# EAGLE board buck_connector-4new (EAGLE 9.2.1)
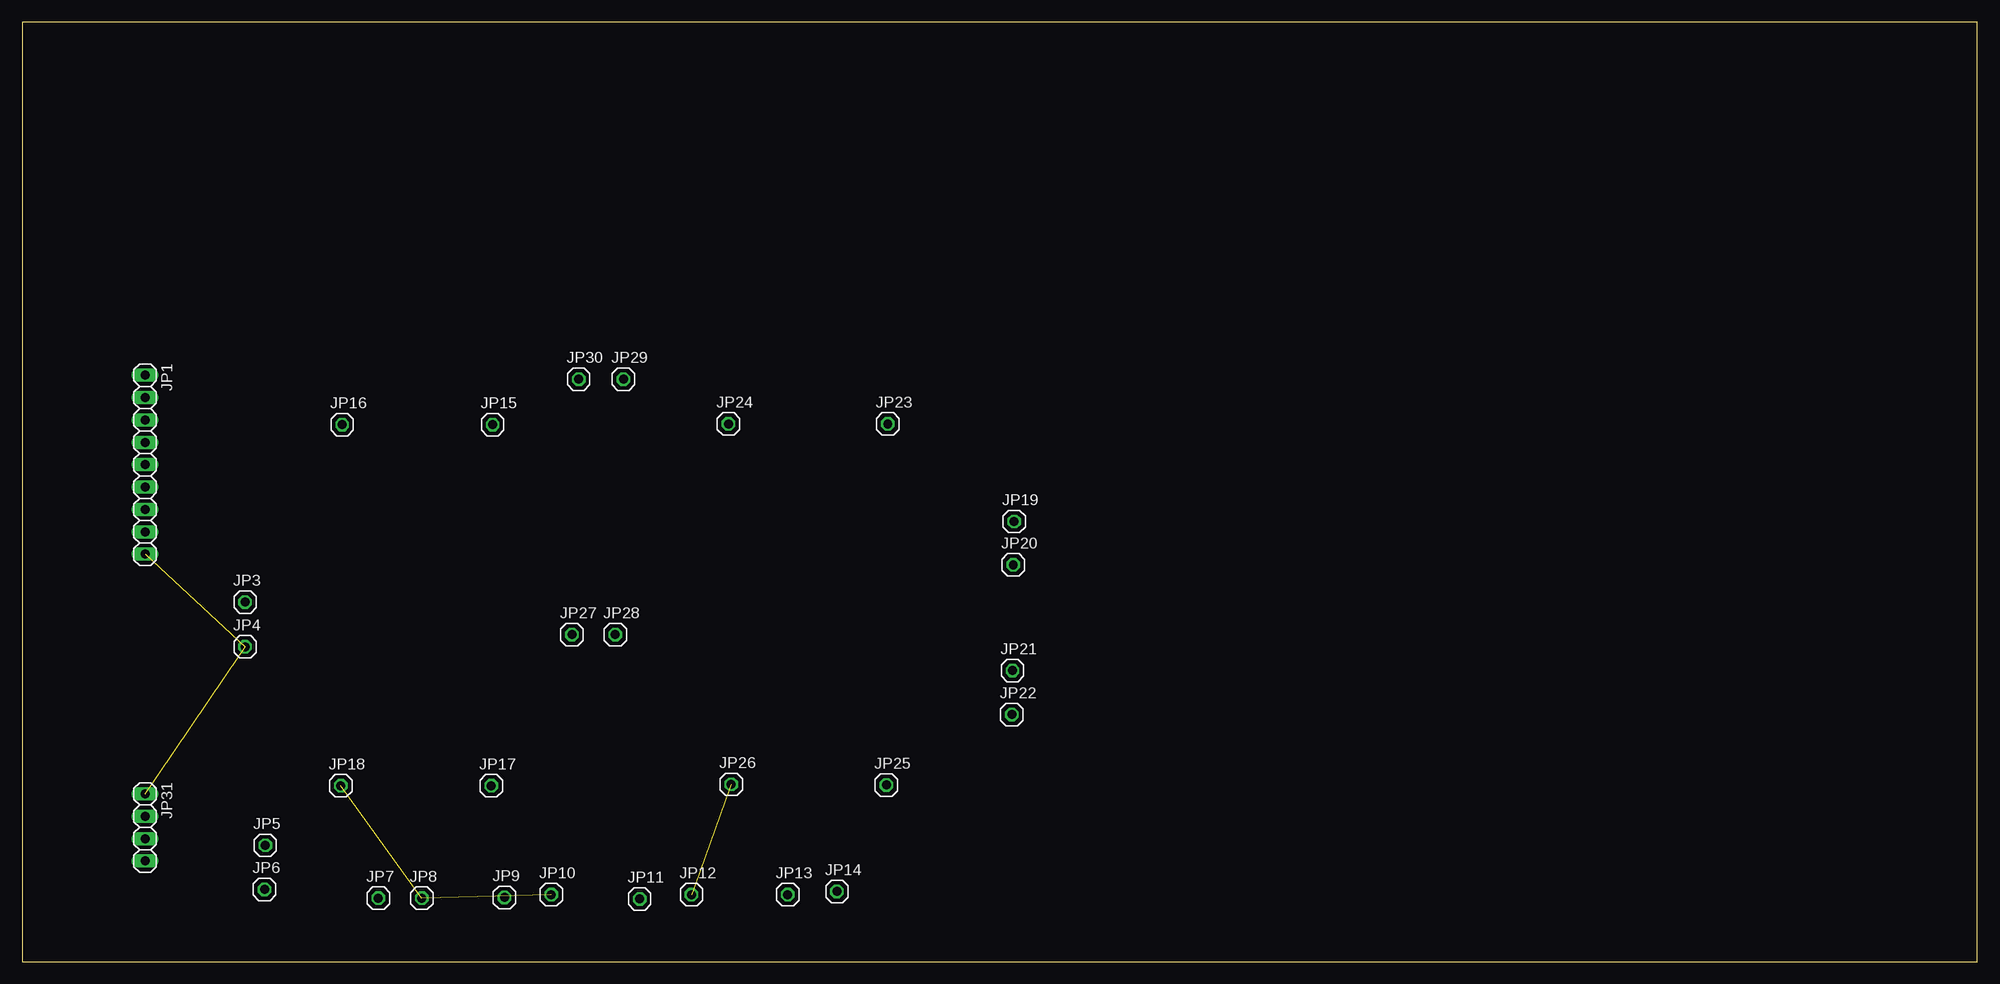
[diagram p0: board, top side]
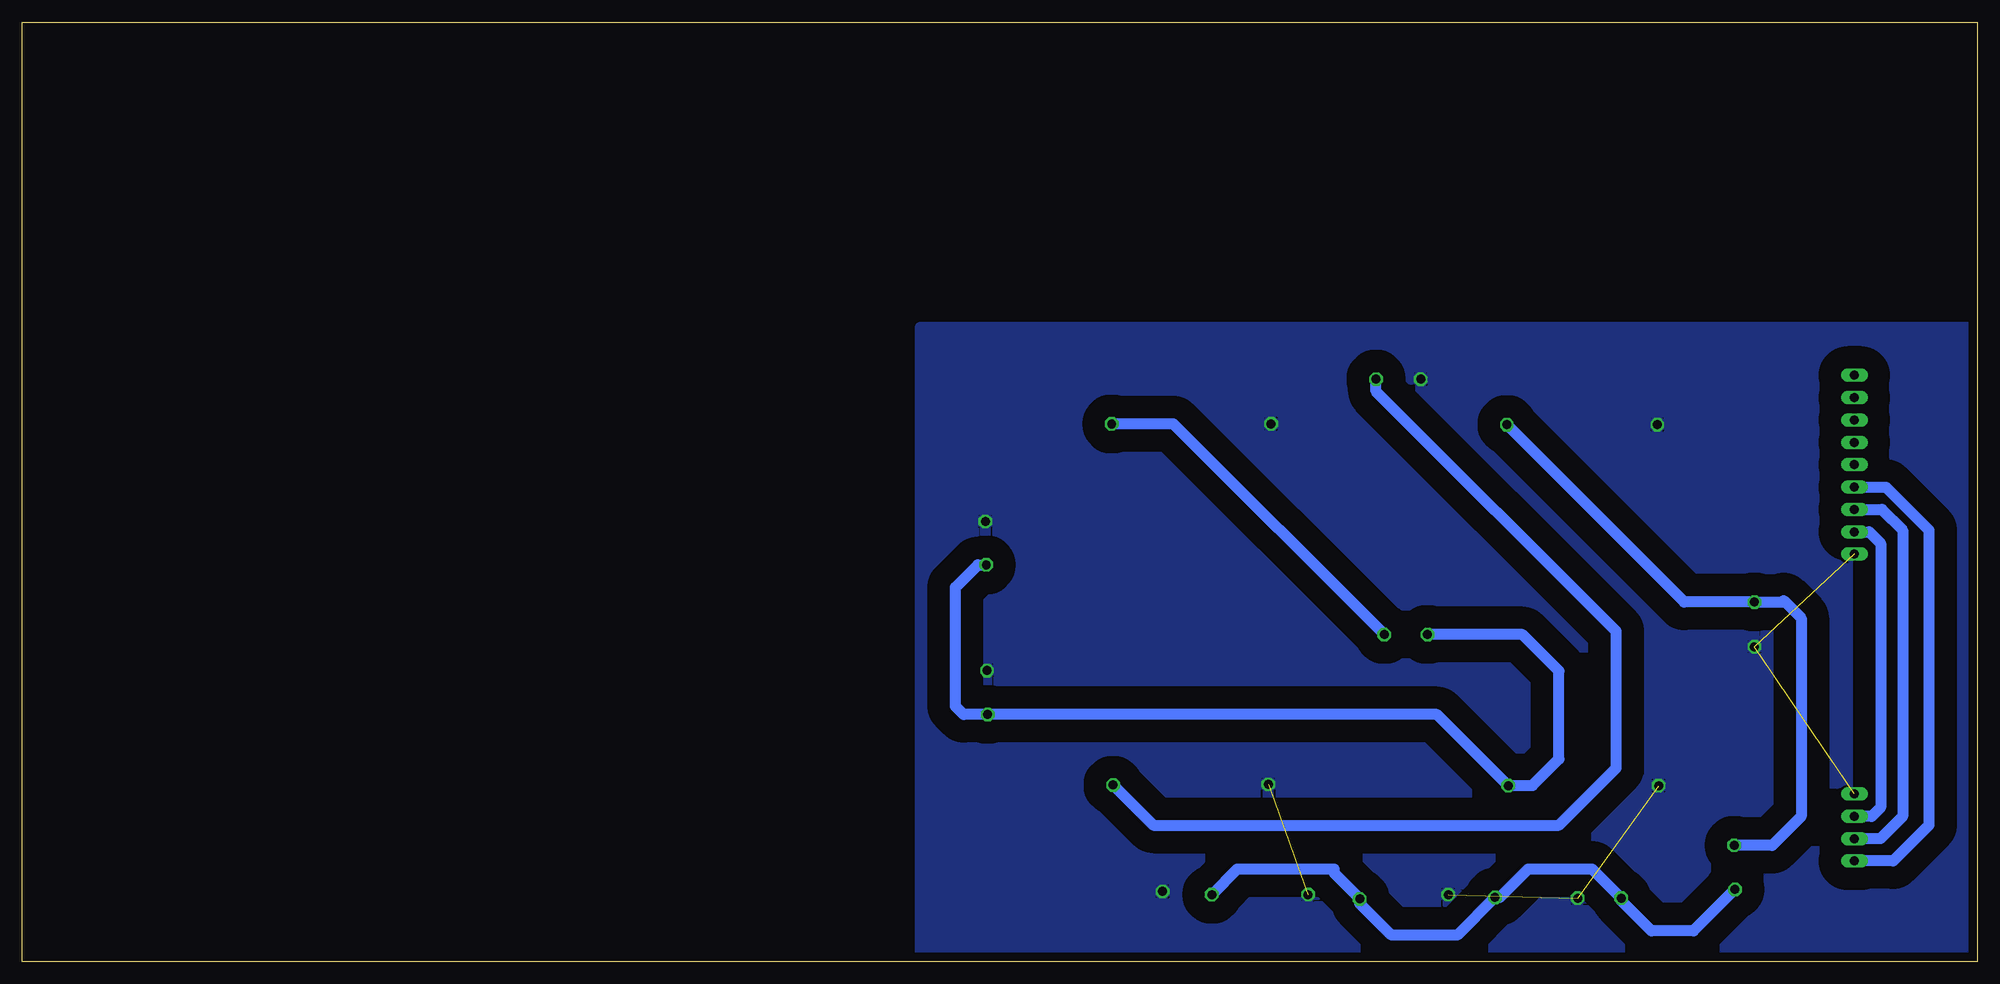
[diagram p1: board, bottom side, seen from below]

Size 221.92 x 106.67 mm. Coordinates in mm from the lower left corner, seen from the top.
Outline: 0,0 221.92,0 221.92,106.67 0,106.67 0,0
Copper layers (1*16): Top 0.035mm / dielectric 1.5mm / Bottom 0.035mm
Design rules "default *": minimum track width 6mil, minimum drill 0.35mm, track to track 100mil, track to pad 6mil, pad to pad 6mil, via to via 6mil, smd to smd 6mil, copper to edge 40mil, drill to drill 6mil, minimum pad ring 10mil, minimum via ring 8mil, stop-mask expansion 4mil, vias tented up to drill 0mil, thermal gap 10mil

## Footprints (pad centres in the part's own frame; a part is rotated, then mirrored left to right if it is on the bottom)
1X09 = drill 1.016 long: 1 -10.16,0; 2 -7.62,0; 3 -5.08,0; 4 -2.54,0; 5 0,0; 6 2.54,0; 7 5.08,0; 8 7.62,0; 9 10.16,0
1X01 = drill 1.016 octagon: 1 0,0
1X04 = drill 1.016 long: 1 -3.81,0; 2 -1.27,0; 3 1.27,0; 4 3.81,0

## Placement (x,y rotation side)
JP1  [1X09]  13.97,56.42 270 top
JP3  [1X01]  25.32,40.83 0 top
JP4  [1X01]  25.32,35.75 0 top
JP5  [1X01]  27.6,13.21 0 top
JP6  [1X01]  27.52,8.21 0 top
JP7  [1X01]  40.44,7.21 0 top
JP8  [1X01]  45.36,7.21 0 top
JP9  [1X01]  54.76,7.29 0 top
JP10  [1X01]  60.06,7.62 0 top
JP11  [1X01]  70.09,7.13 0 top
JP12  [1X01]  75.98,7.62 0 top
JP13  [1X01]  86.9,7.62 0 top
JP14  [1X01]  92.49,7.97 0 top
JP15  [1X01]  53.41,60.97 0 top
JP16  [1X01]  36.33,60.97 0 top
JP17  [1X01]  53.25,19.97 0 top
JP18  [1X01]  36.17,19.97 0 top
JP19  [1X01]  112.59,49.97 0 top
JP20  [1X01]  112.49,45.05 0 top
JP21  [1X01]  112.41,33.05 0 top
JP22  [1X01]  112.33,28.05 0 top
JP23  [1X01]  98.25,61.05 0 top
JP24  [1X01]  80.17,61.05 0 top
JP25  [1X01]  98.09,20.05 0 top
JP26  [1X01]  80.49,20.13 0 top
JP27  [1X01]  62.41,37.13 0 top
JP28  [1X01]  67.33,37.13 0 top
JP29  [1X01]  68.25,66.13 0 top
JP30  [1X01]  63.17,66.13 0 top
JP31  [1X04]  13.97,15.24 270 top

## Library data of the parts
JP1 JP3-JP31 = pinhead

## Nets
GND: JP1.9 JP4.1 JP8.1 JP10.1 JP12.1 JP14.1 JP16.1 JP18.1 JP19.1 JP21.1 JP24.1 JP26.1 JP30.1 JP31.1
N$1: JP6.1 JP7.1 JP9.1 JP11.1 JP13.1
N$2: JP1.8 JP31.2
N$3: JP1.7 JP31.3
N$4: JP1.6 JP31.4
N$5: JP3.1 JP5.1 JP15.1
N$6: JP17.1 JP20.1 JP22.1 JP27.1
N$7: JP23.1 JP28.1
N$9: JP25.1 JP29.1

## Tracks (layer width: path | path; a pad name or v marks a point on that pad's centre or on a via)
GND  (5 unrouted)
  pour Bottom (isolate 0.5): 1,72 120,72 120,0 1,0
N$1
  Bottom 1.27: JP6.1 32.23,3.5 37,3.5 40.44,6.94 JP7.1 43.73,10.5 51,10.5 54.21,7.29 JP9.1 59.05,3 66.5,3 70.09,6.59 JP11.1 73,10.04 73,10.5 84.02,10.5 JP13.1
N$2
  Bottom 1.27: JP1.8 12.3,48.8 11,47.5 11,17.5 12,16.5 JP31.2 | 14.5,16.5 JP31.2 | JP31.2
N$3
  Bottom 1.27: JP1.7 10.84,51.34 8.5,49 8.5,16.5 11.03,13.97 JP31.3
N$4
  Bottom 1.27: JP1.6 10.38,53.88 5.5,49 5.5,15.5 6.5,14.5 9.57,11.43 JP31.4
N$5
  Bottom 1.27: JP15.1 33.27,40.83 JP3.1 22.17,40.83 22,41 20,39 20,16.5 23.29,13.21 JP5.1
N$6
  Bottom 1.27: JP20.1 113.45,45.05 116,42.5 116,29 115.05,28.05 JP22.1 61.33,28.05 JP17.1 53.22,20 50.5,20 47.5,23 47.5,33 51.63,37.13 JP27.1
N$7
  Bottom 1.27: JP28.1 91.25,61.05 JP23.1
N$9
  Bottom 1.27: JP25.1 93.54,15.5 47.5,15.5 41,22 41,37.5 68.25,64.75 JP29.1